# Altium PCB 5V-REG.PcbDoc
Units mil, origin at the board's own origin, x right, y up, seen from the top; angles counter-clockwise.
Board outline 2770 x 760 mil, 2 copper layers (Top Layer, Bottom Layer); 8 components, 4 nets, 17 pads, 0 vias.
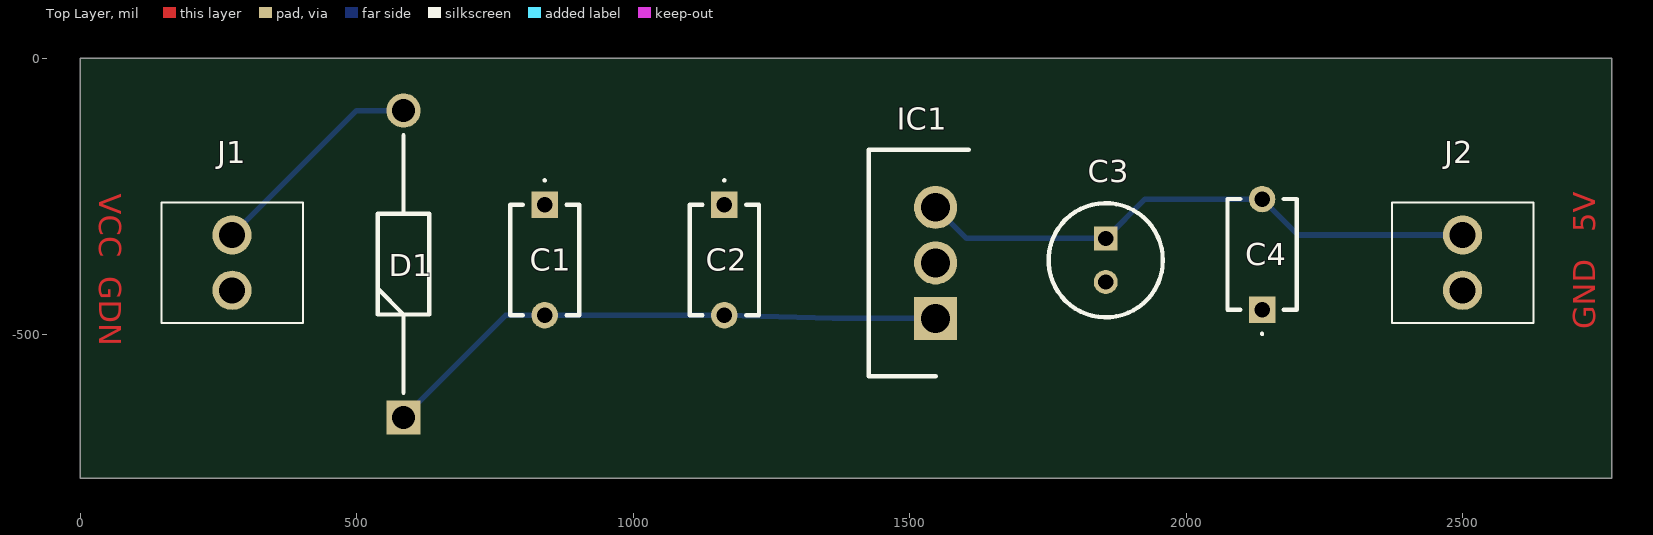
[diagram p0: Top Layer view]
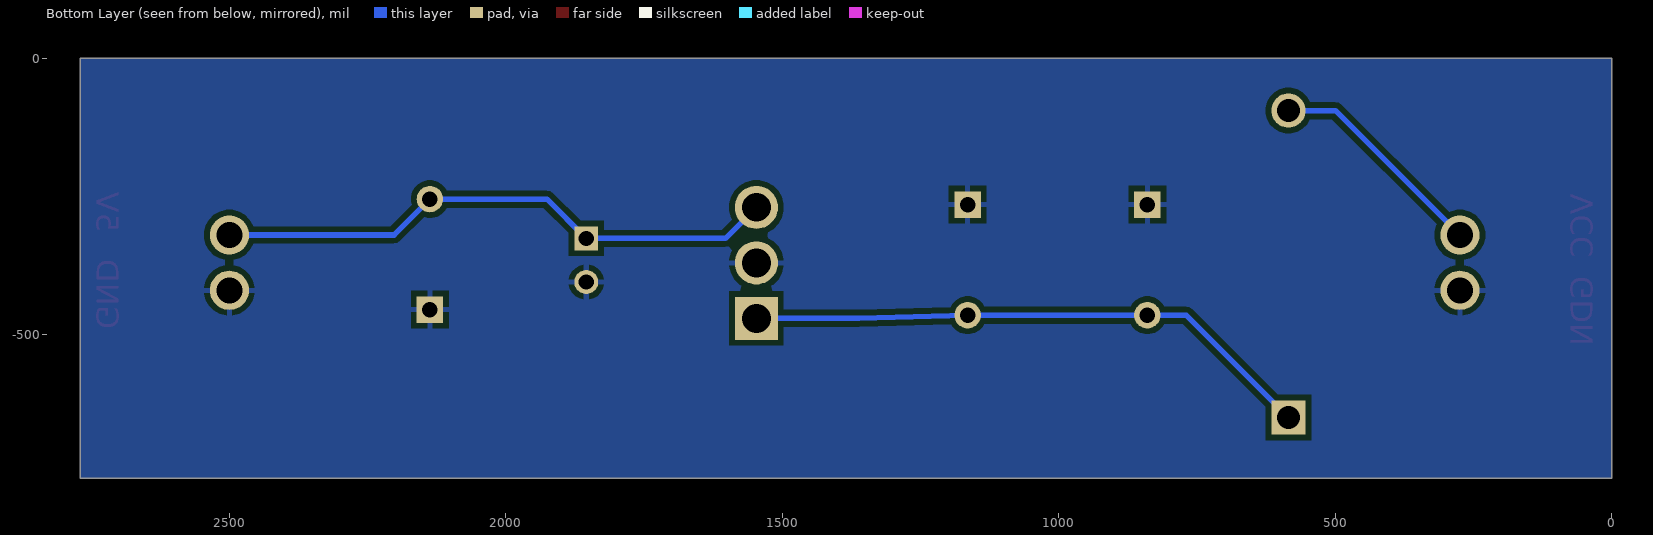
[diagram p1: Bottom Layer view, seen from below]
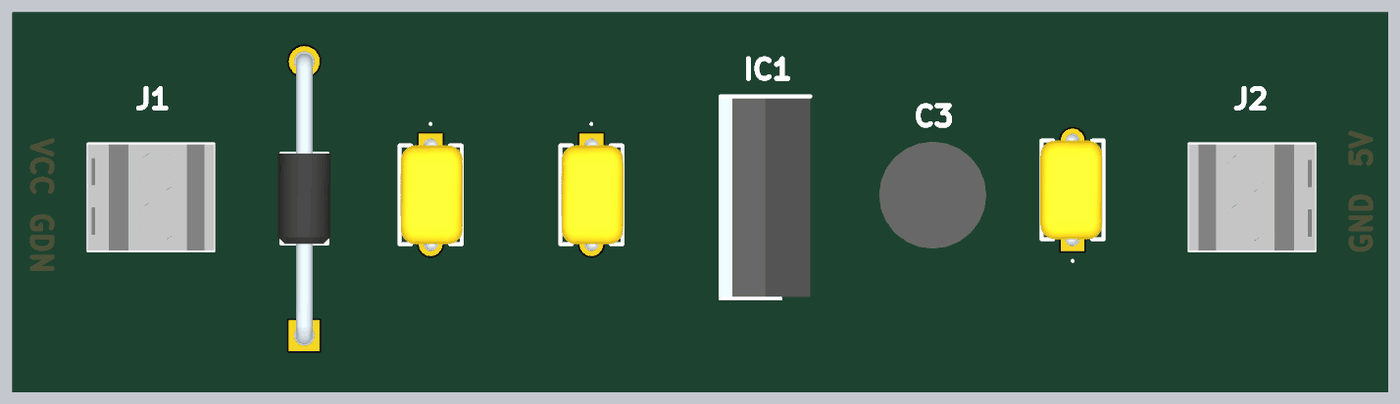
[diagram p2: 3D render of the assembled board from above, using the file's embedded part models]

## Layer stack, top to bottom
Top Solder: solder mask 0.4, Solder Resist, Dk 3.5
Top Layer: signal copper 1.4
Dielectric 1: dielectric 12.6, FR-4, Dk 4.8
Bottom Layer: signal copper 1.4
Bottom Solder: solder mask 0.4, Solder Resist, Dk 3.5

## Board outline
0,-760 0,0 2770,0 2770,-760

## Design rules (kind name [scope] priority, off if disabled: settings)
Clearance [All] p1: gap=10 ignorepadtopadclearanceinfootprint=FALSE
PolygonConnect [All] p1: connectstyle=Relief reliefconductorwidth=10 reliefentries=4 polygonreliefangle="90 Angle" airgapwidth=10
RoutingVias [All] p1: holewidth=28 width=50 viastyle="Through Hole" minholewidth=28 minwidth=50 maxholewidth=28 maxwidth=50
SilkToSolderMaskClearance [IsPad] p1: minsilkscreentomaskgap=5 clearancetoexposedcopper=TRUE
SolderMaskExpansion [All] p1: expansion=4 istentingtop=FALSE
SupplyNets "Schematic Supply Nets_2" [InNet('VCC')] p1: voltage=0.000
SupplyNets "Schematic Supply Nets_1" [InNet('GND')] p2: voltage=0.000
SupplyNets "Schematic Supply Nets" [InNet('5V')] p3: voltage=0.000
Width [All] p1: maxlimit=10 minlimit=10 preferedwidth=10
29 further rules are at their usual default settings.

## Components (designator, comment, footprint, x,y, rotation, side; value= is the part's Value field where it differs from the comment)
C1 "0.1 uF" C323C104J5R5TA 840.19,-265 r270 top
C2 "0.33 uF" C323C104J5R5TA 1165,-265 r270 top
C3 "10 uF" CAPPRD200W50D525H1250 1854.65,-326.26 r270 top
C4 "0.1 uF" C323C104J5R5TA 2137.33,-455 r90 top
D1 "SR106" DIOAD1408W86L464D236 585,-650.12 r90 top
IC1 "L7805CV" TO255P460X1020X2008-3P 1547.02,-470.79 r90 top
J1 "1546215-2" 15462152 275,-420 r90 top
J2 "1546215-2" 15462152 2500,-320 r270 top

## Footprints (in the part's own frame and the unit in brackets; to place one, negate y for a bottom-side part, rotate by r counter-clockwise, add the part's x,y. Pads: shape width x height; smd on the part's side, far side on the other; paste and mask are expansions set on the pad)
15462152 [mm]
  round 1.8 hole 1.2: 1(0,0) 2(2.54,0)
  silkscreen extent -1.5,-3.25 4.04,3.25, body extent -1.46,-3.25 4,3.25, height 9.91
C323C104J5R5TA [mm]
  rect 1.217x1.217 hole 0.71: 1(0,0)
  round 1.217 hole 0.71: 2(5.08,0)
  silkscreen extent -1.16,-1.59 5.08,1.59, body extent -0.31,-1.53 5.39,1.65, height 8.62
CAPPRD200W50D525H1250 [mm]
  rect 1.1x1.1 hole 0.7: 1(0,0)
  round 1.1 hole 0.7: 2(2,0)
  silkscreen extent -1.62,-2.62 3.62,2.63, body extent -1.74,-2.75 3.75,2.75, height 12.5
DIOAD1408W86L464D236 [mm]
  rect 1.575x1.575 hole 1.05: 1(0,0)
  round 1.575 hole 1.05: 2(14.1,0)
  silkscreen extent 1.14,-1.18 12.96,1.18, body extent -0.43,-1.35 14.51,1.35, height 2.72
TO255P460X1020X2008-3P [mm]
  rect 1.98x1.98 hole 1.32: 1(0,0)
  round 1.98 hole 1.32: 2(2.55,0) 3(5.1,0)
  silkscreen extent -2.65,-1.53 7.75,3.07, body extent -2.55,-1.53 7.65,3.07, height 20.08

## Part data
C1 C2 C4: library part C323C104J5R5TA, "Capacitor", Manufacturer_Name=KEMET, Mouser Part Number=80-C323C104J5R, Arrow Part Number=C323C104J5R5TA, Arrow Price/Stock=null?region=nac, Datasheet Link=https://search.kemet.com/component-documentation/download/specsheet/C323C104J5R5TA, Height=7.62mm, Manufacturer_Part_Number=C323C104J5R5TA, Mouser Price/Stock=https://www.mouser.co.uk/ProductDetail/KEMET/C323C104J5R5TA?qs=Qblnm30vzmKCqy99RB1Stw%3D%3D
C3: library part 35ZLR56MEFC5X11, "Capacitor Polarised", Manufacturer_Name=Rubycon, Mouser Part Number=232-35ZLR56MEFC5X11, Datasheet Link=https://www.rubycon.co.jp/wp-content/uploads/catalog-aluminum/ZLR.pdf, Height=12.5mm, Manufacturer_Part_Number=35ZLR56MEFC5X11, Mouser Price/Stock=https://www.mouser.co.uk/ProductDetail/Rubycon/35ZLR56MEFC5X11?qs=iLKYxzqNS77NwHRl7g4ApQ%3D%3D
D1: library part 1N5817-T, "Diode", Manufacturer_Name="Diodes Incorporated", Mouser Part Number=621-1N5817, Arrow Part Number=1N5817-T, Arrow Price/Stock=https://www.arrow.com/en/products/1n5817-t/diodes-incorporated?region=nac, Datasheet Link=http://uk.rs-online.com/web/p/products/8855356P, Manufacturer_Part_Number=1N5817-T, Mouser Price/Stock=https://www.mouser.co.uk/ProductDetail/Diodes-Incorporated/1N5817-T?qs=d3C4ppQ%252BH%2FfTp29c2mqM%252Bg%3D%3D
IC1: "Integrated Circuit", Manufacturer_Name=STMicroelectronics, Mouser Part Number=511-L7805CV, Arrow Part Number=L7805CV, Arrow Price/Stock=https://www.arrow.com/en/products/l7805cv/stmicroelectronics?utm_currency=USD&region=europe, Datasheet Link=http://www.st.com/web/en/resource/technical/document/datasheet/CD00000444.pdf, Height=4.6mm, Manufacturer_Part_Number=L7805CV, Mouser Price/Stock=https://www.mouser.co.uk/ProductDetail/STMicroelectronics/L7805CV?qs=9NrABl3fj%2FqplZAHiYUxWg%3D%3D
J1 J2: "Connector", Manufacturer_Name="TE Connectivity", Mouser Part Number=571-1546215-2, Arrow Part Number=1546215-2, Arrow Price/Stock=https://www.arrow.com/en/products/1546215-2/te-connectivity?utm_currency=USD&region=nac, Datasheet Link=https://www.te.com/commerce/DocumentDelivery/DDEController?Action=srchrtrv&DocNm=1-1773458-1_EURO_STYLE_QRG&DocType=Data%20Sheet&DocLang=English&PartCntxt=1546215-2&DocFormat=pdf, Height=10.3mm, Manufacturer_Part_Number=1546215-2, Mouser Price/Stock=https://www.mouser.co.uk/ProductDetail/TE-Connectivity/1546215-2?qs=Lxq28tKK6BPmJFoAOY7Ljw%3D%3D

## Nets (pads, with @x,y where several pads share a name; then routed paths per layer and width w, separated by ;. In a path a pad name is that pad's centre, name@x,y a point inside that pad or via, vN(x,y) a via of type N, cw(c..) or ccw(c..) an arc to the next point about the centre after c; other vN are vias at no path point)
5V: C3.1 C4.2 IC1.3 J2.1 | length 1032.7
  Bottom Layer w10: IC1.3 1603.28,-326.26 C3.1 1925.91,-255 C4.2 2202.33,-320 J2.1
GND: C1.1 C2.1 C3.2 C4.1 IC1.2 J1.1 J2.2
NetC1_2: C1.2 C2.2 D1.1 IC1.1 | length 1038.8
  Bottom Layer w10: D1.1 770.12,-465 C1.2 C2.2 1361.79,-470.79 IC1.1
VCC: D1.2 J1.2 | length 403.2
  Bottom Layer w10: J1.2 500,-95 D1.2

## Polygon pours and split planes (outlines as drawn)
GND on Bottom Layer "GND_L02_P000" (solid, pour order 0): 2770,0 2770,-760 0,-760 0,0

## Other copper
Top Layer:
  text "VCC" at 35,-245 h40 r270
  text "5V" at 2740,-315 h40 r90
  text "GDN" at 35,-395 h40 r270
  text "GND" at 2740,-490 h40 r90

## Silkscreen, mask and mechanical layers (free items; w line width, h text height)
CUTOUT:
  the board outline again, w10